# Altium PCB ultrasonic.PcbDoc
Units mil, origin at the board's own origin, x right, y up, seen from the top; angles counter-clockwise.
Board outline 985 x 1369.89 mil, 2 copper layers (Top Layer, Bottom Layer); 36 components, 25 nets, 112 pads, 29 vias.
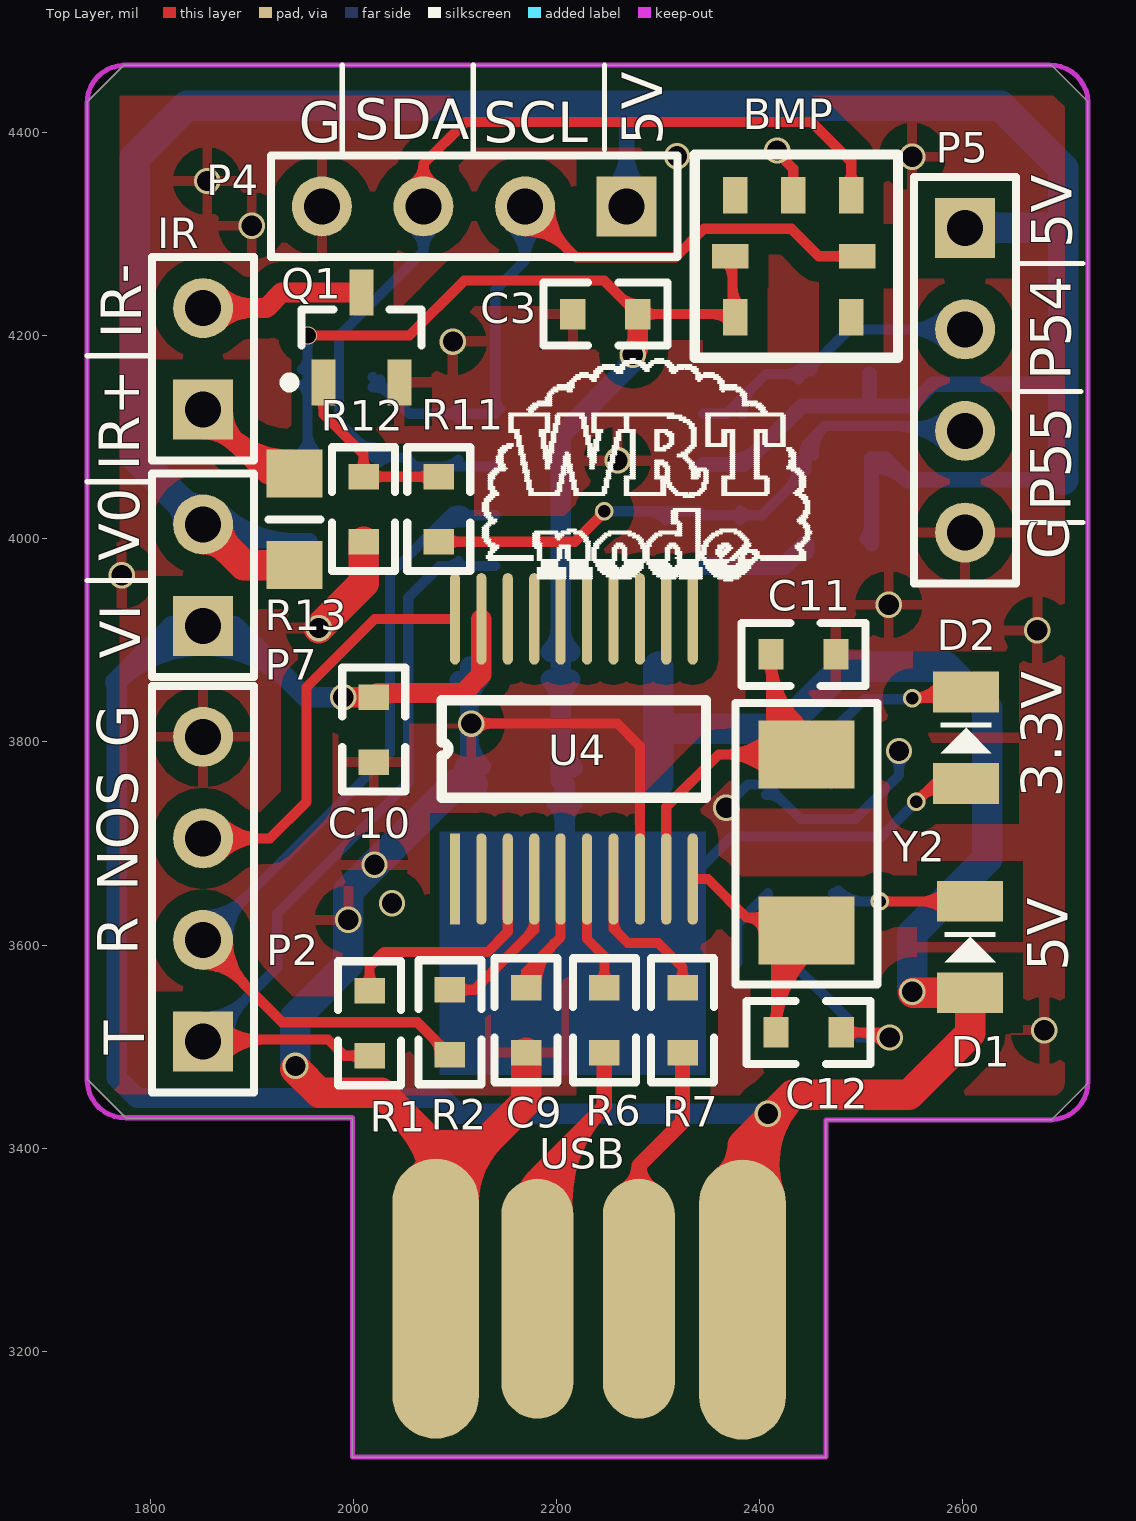
[diagram p0: Top Layer view]
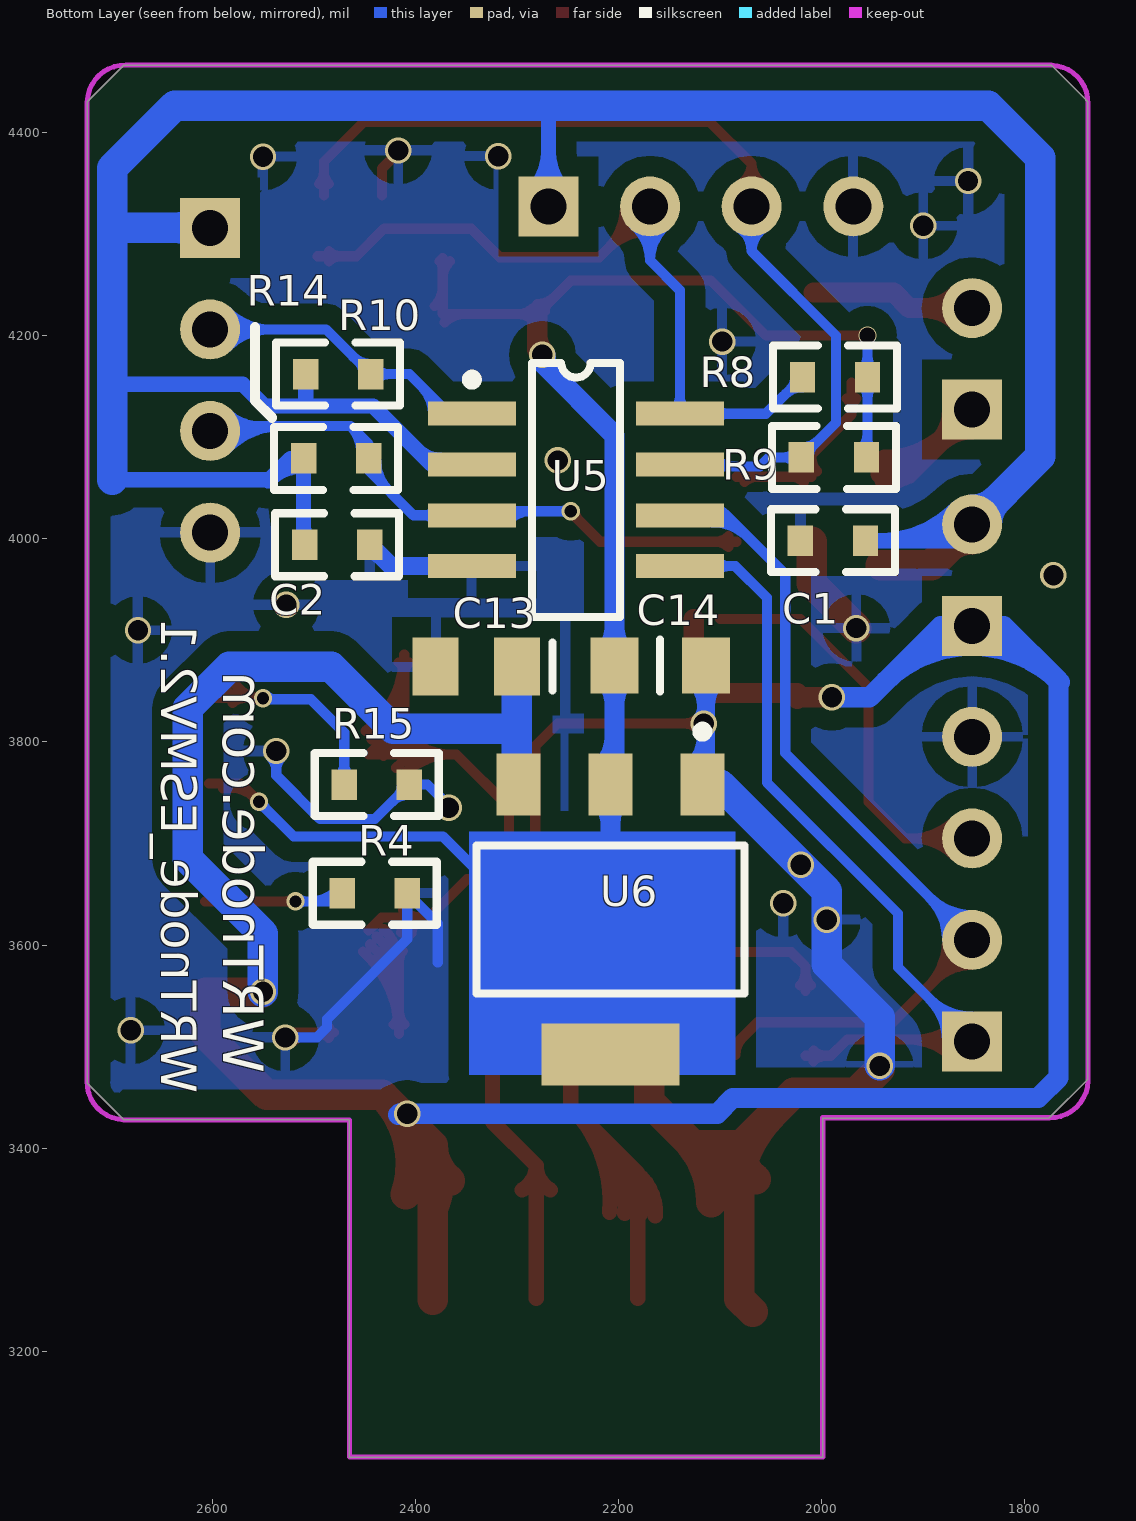
[diagram p1: Bottom Layer view, seen from below]
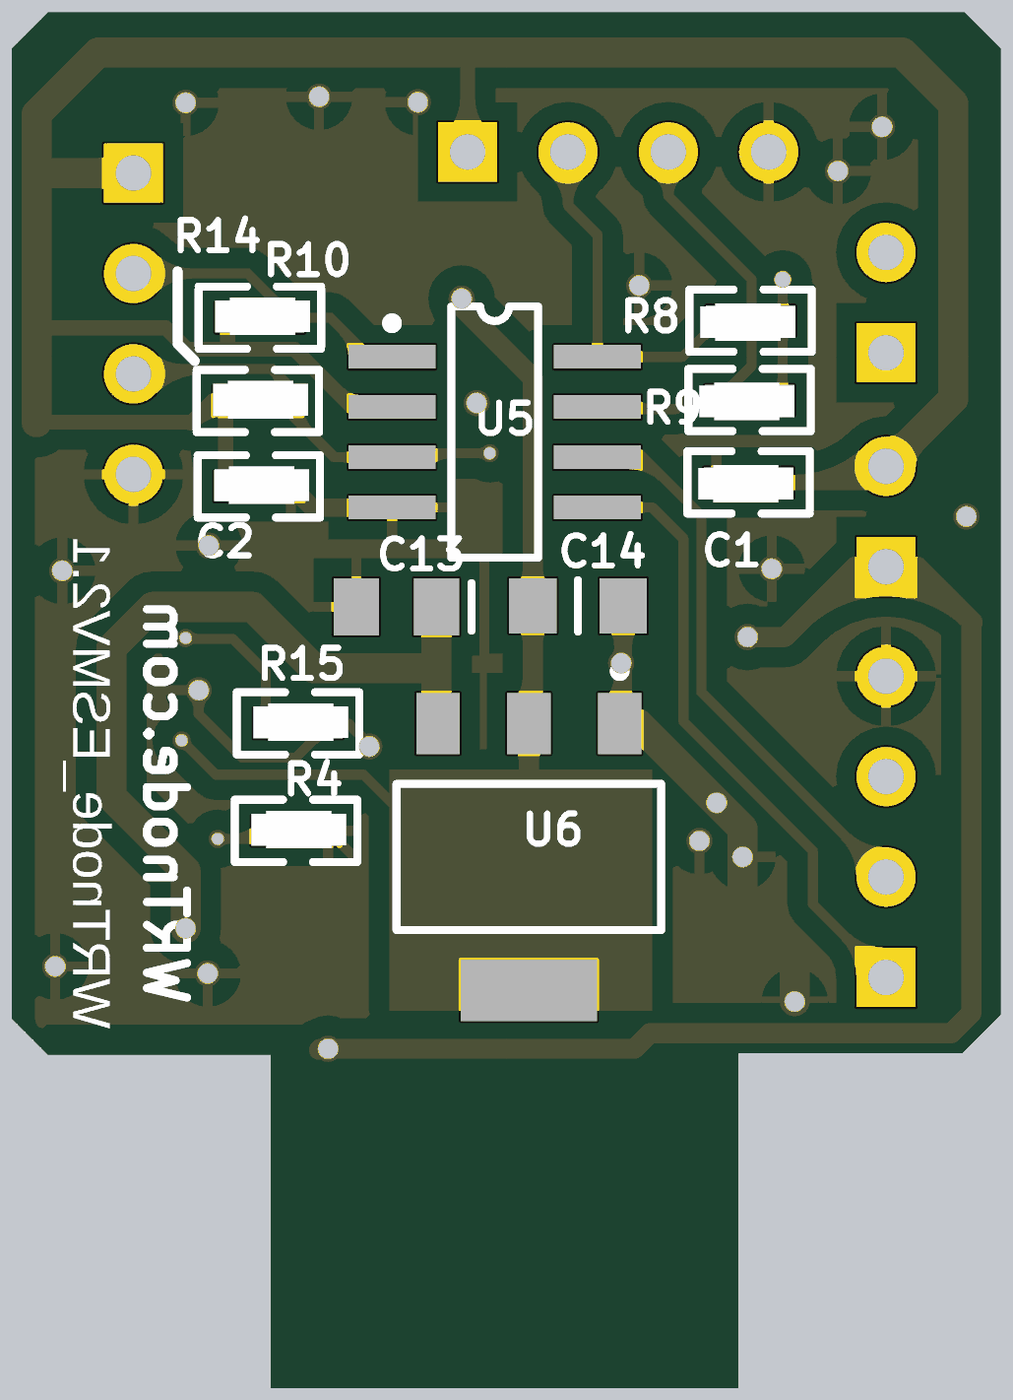
[diagram p2: 3D render of the assembled board from below, using the file's embedded part models]

## Layer stack, top to bottom
Top Layer: signal copper 1.4
Dielectric: dielectric 12.6, FR-4, Dk 4.8
Bottom Layer: signal copper 1.4

## Board outline
1999,3096.11 1999,3429.65 1776.35,3429.65 1776,3430 1738,3468 1738,3499 1738,4430 1774,4466 2205,4466 2687,4466 2723,4430 2723,3464 2687,3428 2465,3428 2465,3096.11 1999,3096.11

## Design rules (kind name [scope] priority, off if disabled: settings)
Clearance [All] p1: gap=7
FabricationTestpoint [(IsPad And (OnTopLayer Or OnBottomLayer))] p1: side=3 testpointundercomponent=TRUE minsize=40 maxsize=100 preferedsize=60 minholesize=0 maxholesize=40 preferedholesize=32 testpointgrid=1 allowsidetop=TRUE allowsidebottom=TRUE usegrid=TRUE gridtolerance=0.01
HoleSize [All] p1: absolutevalues=TRUE maxlimit=160 minlimit=1 maxpercent=80.000 minpercent=20.000
PlaneClearance [All] p1: clearance=10
PlaneConnect [All] p1: planeconnectstyle=Relief reliefexpansion=10 reliefentries=4 reliefconductorwidth=10 reliefairgap=6
PolygonConnect [All] p1: connectstyle=Relief reliefconductorwidth=10 reliefentries=4 polygonreliefangle="90 Angle"
RoutingVias [All] p1: holewidth=10 width=15 viastyle="Through Hole" minholewidth=10 minwidth=15 maxholewidth=25 maxwidth=30
SilkscreenOverComponentPads SilkToSolderMaskClearance [IsPad] p1: minsilkscreentomaskgap=10
SolderMaskExpansion [All] p1: expansion=2
Width [All] p1: maxlimit=50 minlimit=2 preferedwidth=10
23 further rules are at their usual default settings.

## Components (designator, comment, footprint, x,y, rotation, side; value= is the part's Value field where it differs from the comment)
BMP "BMP180" BMP180 2376,4338 r0 top
C1 "Cap" C0603 1994,4002 r180 bottom
C2 "Cap" C0603 2472,3990 r0 bottom
C3 "Cap" C0603 2243,4225 r0 top
C9 "Cap" C0603 2166,3521 r90 top
C10 "Cap" C0603 2016,3807 r90 top
C11 "Cap" C0603 2448,3882 r180 top
C12 "Cap" C0603 2453,3510 r180 top
C13 "Cap" CAP0805(2512) 2340,3874 r0 bottom
C14 "Cap" RES0805(2012M) 2159,3875 r180 bottom
D1 "LED" LED_0805 2607,3598 r270 top
D2 "LED" LED_0805 2603,3804 r270 top
IR "IRLED" HDR1X2 1852,4127 r90 top
P2 "Header 4" HDR1X4 1852,3505 r90 top
P4 "IIC" HDR1X4 2269,4327 r180 top
P5 "DHT11" HDR1X4 2602,4306 r270 top
P7 "Header 2" HDR1X2 1852,3914 r90 top
Q1 "NPN" SOT95P240-3N 2008,4198 r90 top
R1 "Res Semi" C0603 2012,3518 r90 top
R2 "Res Semi" C0603 2091,3519 r90 top
R4 "Res Semi" C0603 2435,3647 r0 bottom
R6 "Res Semi" C0603 2243,3521 r90 top
R7 "Res Semi" C0603 2320,3521 r90 top
R8 "Res1" C0603 1992,4163 r180 bottom
R9 "Res1" C0603 1993,4084 r180 bottom
R10 "Res1" C0603 2471,4158 r0 bottom
R11 "Res1" C0603 2088,4034 r270 top
R12 "Res1" C0603 2014,4034 r270 top
R13 "Res1" RES0805(2012M) 1942,4019 r90 top
R14 "Res1" C0603 2473,4075 r0 bottom
R15 "Res Semi" C0603 2433,3754 r0 bottom
U4 "CH340T" SOP20 2100,3665 r90 top
U5 "STC15W204S" SOP8 2242,4048 r270 bottom
U6 "REG1117-3.3" ZZ311 2208,3625 r0 bottom
USB "USB" USB-JSZ 2321,3252 r180 top
Y2 "XTAL" XTAL-5032 2445,3704 r270 top

## Footprints (in the part's own frame and the unit in brackets; to place one, negate y for a bottom-side part, rotate by r counter-clockwise, add the part's x,y. Pads: shape width x height; smd on the part's side, far side on the other; paste and mask are expansions set on the pad)
BMP180 [mil]
  rect 24x36 smd: 1(0,0) 3(0,-120) 4(114,-120) 6(114,0) 7(57,0)
  rect 36x24 smd: 2(-5,-60) 5(120,-60)
  silkscreen extent -40,-160 160,40
C0603 [mil]
  rect 25x30 smd: 1(-27,-4) 2(37,-4)
  silkscreen extent -56,-35 66,27, body extent -45,-24 49,13, height 30
CAP0805(2512) [mm]
  rect 1.15x1.45 smd: 1(-1.016,0) 2(1.016,0)
  silkscreen extent -1.9,-0.6 -1.9,0.6, body extent -1.07,-0.7 1.07,0.7, height 1.1
HDR1X2 [mm] "Connector; Header; 2 Position"
  rect 1.5x1.5 hole 0.9: 1(0,0)
  round 1.5 hole 0.9: 2(2.54,0)
  silkscreen extent -1.27,-1.27 3.81,1.27
HDR1X4 [mm] "Connector; Header; 4 Position"
  rect 1.5x1.5 hole 0.9: 1(0,0)
  round 1.5 hole 0.9: 2(2.54,0) 3(5.08,0) 4(7.62,0)
  silkscreen extent -1.27,-1.27 8.89,1.27
LED_0805 [mil]
  rect 40x65 smd: 1(45,0) 2(-45,0)
  silkscreen extent -15,-25 15,25, body extent -45,-34 45,34, height 60
RES0805(2012M) [mm]
  rect 1.2x1.4 smd: 1(-1.143,0) 2(1.143,0)
  silkscreen extent 0,-0.65 0,0.65, body extent -1.07,-0.7 1.07,0.7, height 0.65
SOP8 [mm] "Small Outline; 8 Leads; Body Width 4.3 mm; Pitch 1.27 mm"
  rect 0.6x2.2 smd: 1(-1.905,-2.6) 2(-0.635,-2.6) 3(0.635,-2.6) 4(1.905,-2.6) 5(1.905,2.6) 6(0.635,2.6) 7(-0.635,2.6) 8(-1.905,2.6)
  silkscreen extent -3.18,-2.72 3.18,1.1
SOP20 [mil]
  rect 90x10 smd: 1(0,0)
  oval 90x10 smd: 2(0,-26) 3(0,-52) 4(0,-78) 5(0,-104) 6(0,-130) 7(0,-156) 8(0,-182) 9(0,-208) 10(0,-234) 11(256,-234) 12(256,-208) 13(256,-182) 14(256,-156) 15(256,-130) 16(256,-104) 17(256,-78) 18(256,-52) 19(256,-26) 20(256,0)
  silkscreen extent 80,-247 176,13
SOT95P240-3N [mm] "SOT23, 3-Leads, Body 2.9x1.3mm, Pitch 0.95mm, Lead Span 2.4mm, IPC Medium Density"
  rect 1.15x0.6 smd: 1(-1.125,0.95) 2(-1.125,-0.95) 3(1.125,0)
  silkscreen extent -1.25,-1.5 0.7,1.92, body extent -0.7,-1.5 0.7,1.5, height 1.14
USB-JSZ [mm]
  oval 2.17x7 smd: 1(-1.575,0.025) 4(6.096,0)
  oval 1.8x6 smd: 2(1.016,0) 3(3.556,0)
XTAL-5032 [mm]
  rect 1.7x2.4 smd: 1(-2.124,0.025) 2(2.276,0.025)
  silkscreen extent -3.4,-1.75 3.63,1.8, body extent -2.42,-1.45 2.58,1.55, height 1.5
ZZ311 [mm] "SOT-223/SC-73; 4 Leads; Body 6.7 x 7.3 mm, inc. leads (LxW max)"
  rect 1.1x1.55 smd: 1(-2.3,-3.375) 2(0,-3.375) 3(2.3,-3.375)
  rect 3.45x1.55 smd: 4(0,3.375)
  silkscreen extent -3.35,-4.82 3.35,1.85

## Part data
BMP: library part "Header 7", "Header, 7-Pin"
C1 C2 C3 C9 C10 C11 C12 C13 C14: "Capacitor"
D1 D2: library part LED3, "Typical BLUE SiC LED"
IR: library part "Header 2", "Header, 2-Pin"
P2: "Header, 4-Pin"
P4 P5: library part "Header 4", "Header, 4-Pin"
P7: "Header, 2-Pin"
Q1: "NPN Bipolar Transistor"
R1 R2 R4 R6 R7 R15: "Semiconductor Resistor"
R8 R9 R10 R11 R12 R13 R14: "Resistor"
U4: library part CH340
U5: library part stc15f204s_sop8
U6: "800mA and 1A Low Dropout Positive Regulator 2.85V, 3.3V, 5V, and Adjustable"
Y2: "Crystal Oscillator"

## Via types
v1: diameter 26, hole 20, Top Layer to Bottom Layer, tented both sides, 24 vias
v2: diameter 18, hole 12, Top Layer to Bottom Layer, tented both sides, 4 vias
v3: diameter 18, hole 16, Top Layer to Bottom Layer, tented both sides, 1 vias

## Nets (pads, with @x,y where several pads share a name; then routed paths per layer and width w, separated by ;. In a path a pad name is that pad's centre, name@x,y a point inside that pad or via, vN(x,y) a via of type N, cw(c..) or ccw(c..) an arc to the next point about the centre after c; other vN are vias at no path point)
D3.3V: BMP.2 BMP.3 C3.2 C14.1 D2.1 R8.2 R9.2 U6.2 U6.4 | length 2410.4
  Top Layer w10: v3(1955,4200) 2055,4200 2109,4254 2247,4254 C3.2 2373,4221 BMP.2@2373,4276 ; v3@1957.83,4197.17 cw(c1964.66,4190.34) 1964.66,4200 cw(c1964.66,4209.66) v3@1957.83,4202.83 ; 2262.93,4238.07 ccw(c2280,4255.14) C3.2@2280,4231 ; C3.2@2268.96,4232.04 cw(c2260.43,4223.5) C3.2@2272.5,4223.5 ; v1(2275,4181) v1@2280,4186 ; C3.2@2285.3,4215.7 cw(c2298.11,4202.89) 2298.11,4221 cw(c2298.11,4239.11) C3.2@2285.3,4226.3 ; 2351.86,4221 cw(c2351.86,4193.86) BMP.3@2371.05,4213.05 ; BMP.2@2366.05,4273.05 cw(c2349.27,4256.27) 2373,4256.27 ; 2373,4248.14 ccw(c2400.14,4248.14) BMP.3@2380.95,4228.95 ; 2373,4265.93 cw(c2383.07,4265.93) BMP.2@2375.95,4273.05 ; v2(2554,3741) 2572,3759 D2.1 ; v2@2554,3745 ccw(c2554,3754.66) 2560.83,3747.83 ccw(c2567.66,3741) v2@2558,3741 ; v2@2557.75,3744.75 cw(c2582.2,3720.29) D2.1@2589.45,3754.11
  Top Layer w20: v1@2272.88,4183.12 ccw(c2255.69,4200.31) 2280,4200.31 ; v1@2280,4186 C3.2
  Bottom Layer w10: R8.2@1949.7,4151.2 cw(c1936.89,4138.39) 1955,4138.39 cw(c1973.11,4138.39) R8.2@1960.3,4151.2 ; R8.2@1949.7,4166.8 ccw(c1936.89,4179.61) 1955,4179.61 ccw(c1973.11,4179.61) R8.2@1960.3,4166.8 ; R9.2@1950.7,4087.8 ccw(c1940.31,4098.19) 1955,4098.19 ; v3@1952.17,4197.17 cw(c1945.34,4190.34) 1955,4190.34 cw(c1964.66,4190.34) v3@1957.83,4197.17 ; R9.2@1955,4081 R8.2 v3(1955,4200) ; 1955,4103.02 ccw(c1976.52,4103.02) R9.2@1961.3,4087.8 ; 2208,3676 2342,3676 2373,3707 2520,3707 v2(2554,3741) ; v2@2550,3741 cw(c2540.34,3741) 2547.17,3734.17 cw(c2554,3727.34) v2@2554,3737
  Bottom Layer w20: U6.4@2193.5,3506.63 ccw(c2158.48,3541.65) 2208,3541.65 ccw(c2257.52,3541.65) U6.4@2222.5,3506.63 ; C14.1@2194.37,3861.43 cw(c2171.11,3838.18) 2204,3838.18 cw(c2236.89,3838.18) C14.1@2213.63,3861.43 ; C14.1@2194.37,3888.57 ccw(c2171.11,3911.82) 2204,3911.82 ccw(c2236.89,3911.82) C14.1@2213.63,3888.57 ; U6.2@2199.76,3740.78 cw(c2179.87,3720.88) 2208,3720.88 cw(c2236.13,3720.88) U6.2@2216.24,3740.78 ; U6.2@2204,3761.87 C14.1 2204,4102 v1@2275,4173 ; 2204,3804.52 ccw(c2245.79,3804.52) U6.2@2216.24,3774.97 ; U6.4 2208,3676 U6.2 ; 2264.22,4162.22 ccw(c2245.44,4181) v1@2272,4181
D+: R6.2 U4.6 | length 142.5
  Top Layer w10: U4.6 2230,3606 2247,3589 R6.2 ; R6.2@2241.7,3563.3 ccw(c2228.89,3576.11) 2247,3576.11 ccw(c2265.11,3576.11) R6.2@2252.3,3563.3
D-: R7.2 U4.7 | length 198.2
  Top Layer w10: U4.7@2256,3625 ccw(c2277.73,3625) 2262.36,3609.64 ; U4.7 2256,3616 2270,3602 2300,3602 2324,3578 R7.2 ; R7.2@2318.7,3563.3 ccw(c2305.89,3576.11) 2324,3576.11 ccw(c2342.11,3576.11) R7.2@2329.3,3563.3
DATA: P5.2 R10.1 U5.1 | length 526.7
  Bottom Layer w10: U5.1 2367,4123 2406,4162 R10.1 2488,4206 P5.2 ; U5.1@2382.67,4123 cw(c2420.5,4123) 2393.75,4149.75 ; R10.1@2438.7,4156.7 ccw(c2425.89,4143.89) 2425.89,4162 ccw(c2425.89,4180.11) R10.1@2438.7,4167.3 ; R10.1@2444,4172 ccw(c2444,4196.14) 2461.07,4179.07 ; R10.1@2451.5,4164.5 cw(c2463.57,4164.5) R10.1@2455.04,4173.04 ; P5.2@2584.66,4188.66 ccw(c2542.79,4146.79) 2542.79,4206 ccw(c2542.79,4265.21) P5.2@2584.66,4223.34 ; P5.2@2591.73,4195.73 ccw(c2566.93,4170.93) 2566.93,4206 ccw(c2566.93,4241.07) P5.2@2591.73,4216.27
GND: BMP.7 C1.1 C2.1 C3.1 C9.1 C10.1 C11.1 C12.1 C13.2 C14.2 P2.4 P4.4 P5.4 Q1.2 R4.1 R12.2 R15.1 U4.8 U5.4 U6.1 USB.4 | length 2734.3
  Top Layer w10: v1@2110,3818 v1(2116,3818) 2260,3818 2282,3796 U4.8 ; v1@2121.66,3812.34 cw(c2135.31,3798.69) 2135.31,3818 cw(c2135.31,3837.31) v1@2121.66,3823.66 ; v1@2417,4380 2433,4364 BMP.7 ; C12.1 2523,3514 v1(2528,3509) ; C12.1@2485.3,3508.7 cw(c2498.11,3495.89) 2498.11,3514 cw(c2498.11,3532.11) C12.1@2485.3,3519.3 ; 2496.62,3514 cw(c2496.62,3477.62) v1@2522.34,3503.34
  Top Layer w30: v1@1943,3478 1966.5,3454.5 2027.5,3454.5 2081,3401 ; v1(1966,3912) 2010,3956 R12.2 ; 2049.49,3432.51 cw(c1967.75,3350.77) USB.4@2083.28,3347 ; USB.4@2064.87,3369.62 ccw(c2042.41,3401) 2081,3401 ; USB.4@2068,3239 USB.4 USB.4@2081,3357 ; USB.4@2081,3374.8 ccw(c2081,3417.76) 2111.38,3387.38 ; 2083.5,3403 2121,3403 ; USB.4@2097.13,3369.62 cw(c2119.59,3401) 2081,3401 ; USB.4@2108.72,3347.08 cw(c2199.58,3347.08) 2135.33,3411.33 ; C9.1 2170,3446 USB.4@2081,3357 ; USB.4@2081,3357 2081,3401
  Bottom Layer w10: v1@2367,3737 2388,3758 R15.1 2440,3724 2494.01,3724 2537,3766.99 v1(2537,3791) ; 2378,3583 2378,3621 R4.1 2408,3606 2487,3527 2487,3519 2497,3509 v1(2528,3509) ; R15.1@2406,3748 cw(c2406,3723.86) 2423.07,3740.93 ; R15.1@2413.5,3755.5 ccw(c2425.57,3755.5) R15.1@2417.04,3746.96 ; v1@2531.34,3785.34 cw(c2517.69,3771.69) 2537,3771.69 cw(c2556.31,3771.69) v1@2542.66,3785.34
  Bottom Layer w18: C14.2@2103.66,3860.72 cw(c2078.7,3835.76) 2114,3835.76 cw(c2149.3,3835.76) C14.2@2124.34,3860.72 ; U6.1@2108.5,3775.68 ccw(c2095.23,3788.95) 2114,3788.95 ; 2114,3803.51 cw(c2130.49,3803.51) v1@2118.83,3815.17 ; v1@2114,3805.61 ccw(c2156.32,3805.61) U6.1@2126.4,3775.68 ; 2114,3832.49 ccw(c2130.49,3832.49) v1@2118.83,3820.83 ; C14.2 2114,3761.32 U6.1 ; U5.4 2424,3973 C2.1 ; C2.1@2434.76,3983.76 cw(c2445,3973.51) C2.1@2445,3988
  Bottom Layer w30: v1@1943,3481.5 1943,3529 1995,3581 1995,3653.11 2099.76,3757.87 U6.1
  other v1: 1943,3481 2680,3516 1995,3625 2038,3641 2020.81,3678.92 2367,3735 2673,3910 2527,3935 1772,3964 2260,4077 2098,4194 1900,4308 1856,4352 2550,4376 2318.53,4376.53 2417,4382
IR: P5.3 R11.2 R14.1 U5.3 | length 899
  Top Layer w10: R11.2 2218,3997 v2@2245,4024 ; R11.2@2091.8,3991.7 cw(c2104.61,3978.89) 2104.61,3997 cw(c2104.61,4015.11) R11.2@2091.8,4002.3 ; 2239.46,4018.46 ccw(c2230.93,4027) v2@2243,4027
  Bottom Layer w10: v2(2247,4027) 2340.36,4027 U5.3 2402,4023 2446,4067 R14.1 2446,4093 2464,4111 ; v2@2249.83,4024.17 cw(c2256.66,4017.34) 2256.66,4027 cw(c2256.66,4036.66) v2@2249.83,4029.83 ; 2286.77,4027 cw(c2286.77,3996.9) U5.3@2308.05,4018.18 ; U5.3@2380.67,4018.18 cw(c2392.3,4006.56) 2392.3,4023 cw(c2392.3,4039.44) U5.3@2380.67,4027.82 ; 2426.48,4047.48 ccw(c2397.46,4076.5) R14.1@2438.5,4076.5 ; R14.1@2443.51,4081.29 cw(c2461.76,4082.86) 2448.81,4095.81 ; R14.1@2453.47,4082.14 cw(c2489.74,4085.26) 2464,4111 ; 2530.71,4111 cw(c2530.71,4034.71) P5.3@2584.66,4088.66 ; P5.3@2584.66,4123.34 cw(c2554.86,4153.14) 2554.86,4111 cw(c2554.86,4058.86) P5.3@2591.73,4095.73 ; P5.3 2597,4111 2464,4111
NetC9_2: C9.2 U4.5 | length 224.1
  Top Layer w10: C9.2@2165.2,3563.76 ccw(c2156.69,3574) 2170,3574 ; C9.2@2174.8,3563.76 cw(c2183.31,3574) 2170,3574 ; C9.2@2180,3558 cw(c2242.77,3558) 2198.38,3602.38 ; 2181.31,3585.31 ccw(c2208.63,3558) C9.2 2170,3574 ; U4.5 2204,3608 2170,3574
NetC11_2: C11.2 U4.9 Y2.1 | length 844
  Top Layer w10: U4.9 2308,3736 2359.61,3787.61 Y2.1 2411,3822.61 C11.2 ccw(c2504.78,3885.99) Y2.1@2449.12,3810.52 ; C11.2@2405.7,3878.2 cw(c2392.89,3865.39) 2411,3865.39 cw(c2429.11,3865.39) C11.2@2416.3,3878.2 ; 2411,3826.59 ccw(c2460.97,3826.59) Y2.1@2431.31,3786.38 ; 2411,3846.39 ccw(c2475.57,3846.39) Y2.1@2437.24,3794.43 ; 2411,3866.19 ccw(c2490.18,3866.19) Y2.1@2443.18,3802.47 ; Y2.1@2412.09,3767.49 ccw(c2363.5,3718.89) 2363.5,3787.61 ccw(c2363.5,3856.33) Y2.1@2412.09,3807.74 ; Y2.1@2413.27,3820.34 cw(c2399.62,3806.69) Y2.1@2416.28,3796.94 ; Y2.1@2419.16,3774.56 ccw(c2387.64,3743.04) 2387.64,3787.61 ccw(c2387.64,3832.19) Y2.1@2419.16,3800.67
NetC12_2: C12.2 U4.10 Y2.2 | length 570
  Top Layer w10: U4.10 2349,3665 2387,3627 ; 2393.95,3627 ccw(c2393.95,3652.65) Y2.2@2412.09,3634.51 ; 2398.01,3627 cw(c2398.01,3611.1) Y2.2@2413.84,3612.62 ; Y2.2@2403.89,3611.66 ccw(c2387,3610.04) 2387,3627 ; C12.2@2410.7,3521.8 ccw(c2397.89,3534.61) 2416,3534.61 ccw(c2434.11,3534.61) C12.2@2421.3,3521.8 ; Y2.2@2412.09,3594.26 cw(c2402.66,3584.83) Y2.2@2416,3584.83 ; C12.2@2416,3512.7 cw(c2525.57,3512.7) Y2.2@2451.47,3593.42 ; C12.2 Y2.2@2416,3584.39 ; 2416,3535.46 cw(c2504.68,3535.46) Y2.2@2444.71,3600.78 ; 2416,3558.21 cw(c2483.79,3558.21) Y2.2@2437.94,3608.15 ; Y2.2@2416,3580.97 cw(c2462.9,3580.97) Y2.2@2431.18,3615.52 ; Y2.2 2433.39,3627 2387,3627
NetD1_2: D1.2 R4.2 | length 254.5
  Top Layer w10: v2(2518,3643) D1.2 ; v2@2520.83,3640.17 cw(c2527.66,3633.34) 2527.66,3643 cw(c2527.66,3652.66) v2@2520.83,3645.83 ; D1.2@2583.89,3632.39 ccw(c2558.29,3606.79) 2558.29,3643 ccw(c2558.29,3679.21) D1.2@2583.89,3653.61
  Bottom Layer w10: R4.2 2480,3643 v2(2518,3643) ; R4.2@2477.3,3653.8 ccw(c2503.38,3679.88) 2503.38,3643 ; v2@2515.17,3640.17 ccw(c2508.34,3633.34) 2508.34,3643 ccw(c2508.34,3652.66) v2@2515.17,3645.83
NetD2_2: D2.2 R15.2 | length 319.5
  Top Layer w10: v2@2552.83,3840.17 cw(c2559.66,3833.34) 2559.66,3843 cw(c2559.66,3852.66) v2@2552.83,3845.83 ; 2568.77,3843 cw(c2568.77,3827.27) D2.2@2579.89,3838.39 ; 2569.29,3843 ccw(c2569.29,3863.95) D2.2@2586.41,3851.88 ; D2.2@2578.24,3857.64 cw(c2550,3877.55) v2(2550,3843) 2597,3843 D2.2
  Bottom Layer w10: R15.2@2464.7,3765.8 ccw(c2451.89,3778.61) 2470,3778.61 ccw(c2488.11,3778.61) R15.2@2475.3,3765.8 ; R15.2 2470,3809 2503,3842 v2@2550,3842 ; 2537.93,3842 ccw(c2537.93,3855.07) v2@2547.17,3845.83
NetIR_1: IR.1 R13.2 | length 291.3
  Top Layer w20: IR.1@1852,4107.47 cw(c1852,4060.33) 1885.34,4093.66 cw(c1918.67,4127) IR.1@1871.53,4127 ; IR.1 1915,4064 R13.2 ; IR.1@1875.44,4103.56 ccw(c1938.06,4166.19) R13.2@1938.06,4077.62 ; 1909.58,4069.42 ccw(c1938.06,4097.9) R13.2@1938.06,4057.62
NetIR_2: IR.2 Q1.3 | length 236.4
  Top Layer w20: IR.2 1914,4227 1929.29,4242.29 Q1.3 ; IR.2@1865.81,4213.19 cw(c1899.14,4179.86) 1899.14,4227 cw(c1899.14,4274.14) IR.2@1865.81,4240.81
NetP2_3: P2.3 U4.20 | length 551.8
  Top Layer w10: P2.3 1918,3705 1954,3741 1954,3854 2021,3921 U4.20 ; P2.3@1862.27,3694.73 cw(c1887.07,3669.93) 1887.07,3705 cw(c1887.07,3740.07) P2.3@1862.27,3715.27 ; P2.3@1869.34,3687.66 cw(c1911.21,3645.79) 1911.21,3705 cw(c1911.21,3764.21) P2.3@1869.34,3722.34
NetQ1_2: Q1.1 R11.1 R12.1 | length 294.2
  Top Layer w10: Q1.1@1965.78,4138.07 cw(c1954.16,4126.44) 1970.6,4126.44 cw(c1987.04,4126.44) Q1.1@1975.41,4138.07 ; Q1.1 1970.6,4122.4 2010,4083 R12.1 R11.1 ; R12.1@2004.7,4066.3 ccw(c1991.89,4079.11) 2010,4079.11 ccw(c2028.11,4079.11) R12.1@2015.3,4066.3 ; R12.1@2017.8,4055.7 cw(c2030.61,4042.89) 2030.61,4061 cw(c2030.61,4079.11) R12.1@2017.8,4066.3 ; R11.1@2076.2,4055.7 ccw(c2063.39,4042.89) 2063.39,4061 ccw(c2063.39,4079.11) R11.1@2076.2,4066.3
NetR1_2: R1.2 U4.3 | length 297.5
  Top Layer w10: R1.2@2010.7,3560.3 ccw(c1997.89,3573.11) 2016,3573.11 ccw(c2034.11,3573.11) R1.2@2021.3,3560.3 ; R1.2 2016,3579 2030,3593 2131.96,3593 2152,3613.04 U4.3 U4.3@2152,3622
NetR2_2: R2.2 U4.4 | length 204.8
  Top Layer w10: R2.2 2119,3556 2178,3615 U4.4 ; R2.2@2102.8,3550.7 cw(c2115.61,3537.89) 2115.61,3556 cw(c2115.61,3574.11) R2.2@2102.8,3561.3 ; 2170.93,3607.93 ccw(c2153.86,3625) U4.4@2178,3625
NetR6_1: R6.1 USB.3 | length 620.5
  Top Layer w15: USB.3@2163.99,3333.27 cw(c2213.28,3337.34) 2178.31,3372.31 ; USB.3@2171.18,3360.83 ccw(c2165.86,3375) 2181,3375 ; USB.3@2178.94,3334.51 cw(c2255.58,3340.83) 2201.2,3395.2 ; USB.3 2181,3375 ; USB.3@2190.82,3360.83 cw(c2196.14,3375) 2181,3375 ; USB.3@2193.89,3335.74 cw(c2297.89,3344.31) 2224.1,3418.1 ; USB.3@2208.84,3336.97 cw(c2340.19,3347.8) 2247,3441 ; R6.1 2247,3441 ; 2181,3375 2247,3441
NetR7_1: R7.1 USB.2 | length 318.2
  Top Layer w15: USB.2@2267.06,3358.88 ccw(c2253.17,3383) 2281,3383 ; USB.2 2281,3383 ; USB.2@2294.94,3358.88 cw(c2308.83,3383) 2281,3383 ; R7.1 2324,3426 2281,3383
RXD: P2.2 R2.1 U5.6 | length 1292.7
  Top Layer w10: P2.2@1852,3580.47 cw(c1852,3528.5) 1888.75,3565.25 ; P2.2@1852,3590.47 cw(c1852,3562.64) 1871.68,3582.32 ; P2.2@1852,3602 1930,3524 2063,3524 R2.1 ; P2.2@1866.53,3605 ccw(c1908.84,3605) 1878.92,3575.08 ; P2.2@1876.53,3605 ccw(c1942.98,3605) 1895.99,3558.01 ; 2077.93,3509.07 cw(c2060.86,3492) R2.1@2085,3492 ; R2.1@2083.96,3503.04 ccw(c2092.5,3511.57) R2.1@2092.5,3499.5
  Bottom Layer w10: P2.2 2036,3789 2036,3965 2094,4023 ; P2.2@1852,3619.53 ccw(c1852,3654.6) 1876.8,3629.8 ccw(c1901.6,3605) P2.2@1866.53,3605 ; P2.2@1852,3629.53 ccw(c1852,3688.74) 1893.87,3646.87 ccw(c1935.74,3605) P2.2@1876.53,3605 ; 2072.37,4001.37 cw(c2108.14,3965.6) U5.6@2108.14,4016.19 ; 2086.93,4015.93 cw(c2096.47,4006.39) U5.6@2104.23,4017.43 ; 2089.44,4018.44 cw(c2108.14,3999.75) U5.6@2108.14,4026.19 ; 2095.34,4024.34 cw(c2103.41,4016.27) U5.6@2109.98,4025.61 ; U5.6@2102.82,4018.75 ccw(c2094,4011.72) 2094,4023 ; U5.6@2102.82,4027.25 cw(c2094,4034.28) 2094,4023 ; U5.6 2094,4023
SCL: BMP.5 P4.2 R8.1 U5.8 | length 1101.2
  Top Layer w10: P4.2@2169,4302.47 cw(c2169,4243.26) 2210.87,4285.13 cw(c2252.74,4327) P4.2@2193.53,4327 ; P4.2@2169,4312.47 cw(c2169,4277.4) 2193.8,4302.2 cw(c2218.6,4327) P4.2@2183.53,4327 ; P4.2 2219,4277 2317,4277 2345,4305 2431,4305 2458,4278 BMP.5 ; BMP.5@2485.05,4273.05 ccw(c2473.1,4261.1) 2473.1,4278 ccw(c2473.1,4294.9) BMP.5@2485.05,4282.95
  Bottom Layer w10: R8.1@2019,4149 cw(c2019,4124.86) 2036.07,4141.93 ; R8.1 2055,4123 U5.8 2139.64,4244.64 2169,4274 ; R8.1@2026.5,4156.5 ccw(c2038.57,4156.5) R8.1@2030.04,4147.96 ; U5.8@2103.33,4118.18 ccw(c2091.7,4106.56) 2091.7,4123 ccw(c2091.7,4139.44) U5.8@2103.33,4127.82 ; U5.8@2134.82,4127.82 ccw(c2123.19,4139.44) 2139.64,4139.44 ccw(c2156.08,4139.44) U5.8@2144.45,4127.82 ; P4.2@2153.13,4308.3 cw(c2124.01,4274) 2169,4274 ; P4.2@2159.6,4315.93 cw(c2142.35,4295.61) 2169,4295.61 cw(c2195.65,4295.61) P4.2@2178.4,4315.93 ; P4.2 2169,4274 ; P4.2@2184.87,4308.3 ccw(c2213.99,4274) 2169,4274
SDA: BMP.6 P4.3 R9.1 U5.7 | length 1155.9
  Top Layer w10: P4.3@2056.95,4348.36 ccw(c2045.31,4369) 2069,4369 ; P4.3 2069,4369 ; P4.3@2081.05,4348.36 cw(c2092.69,4369) 2069,4369 ; BMP.6@2485.05,4348.95 ccw(c2473.1,4360.9) 2490,4360.9 ccw(c2506.9,4360.9) BMP.6@2494.95,4348.95 ; BMP.6 2490,4371 2451,4410 2110,4410 2069,4369
  Bottom Layer w10: 2002.93,4097.07 ccw(c2020,4114.14) R9.1@2020,4090 ; R9.1@2008.96,4091.04 cw(c2000.43,4082.5) R9.1@2012.5,4082.5 ; R9.1@2025.3,4074.7 cw(c2038.11,4061.89) 2038.11,4080 cw(c2038.11,4098.11) R9.1@2025.3,4085.3 ; P4.3@2056.1,4306.14 cw(c2041.8,4283) 2069,4283 ; P4.3 2069,4283 ; P4.3@2081.9,4306.14 ccw(c2096.2,4283) 2069,4283 ; 2086.87,4071 ccw(c2086.87,4094.27) U5.7@2103.33,4077.82 ; U5.7 2137.64,4071 2061,4071 2052,4080 R9.1 1986,4114 1986,4200 2069,4283
TXD: P2.1 R1.1 U5.5 | length 1142.3
  Top Layer w10: P2.1@1852,3502 1857,3507 1975,3507 1991,3491 R1.1 ; P2.1@1862.27,3494.73 cw(c1891.9,3465.1) 1891.9,3507 ; P2.1@1862.27,3515.27 ccw(c1882.24,3535.24) 1882.24,3507 ; P2.1@1869.34,3487.66 cw(c1916.04,3440.96) 1916.04,3507 ; P2.1@1869.34,3522.34 ccw(c1906.39,3559.39) 1906.39,3507 ; R1.1@2008.2,3485.7 ccw(c1995.39,3472.89) 1995.39,3491 ccw(c1995.39,3509.11) R1.1@2008.2,3496.3
  Bottom Layer w10: P2.1 1925,3578 1925,3631 2054,3760 2054,3942 2085,3973 U5.5 ; P2.1@1852,3519.53 ccw(c1852,3554.6) 1876.8,3529.8 ccw(c1901.6,3505) P2.1@1866.53,3505 ; P2.1@1852,3529.53 ccw(c1852,3588.74) 1893.87,3546.87 ccw(c1935.74,3505) P2.1@1876.53,3505 ; U5.5@2103.33,3968.18 ccw(c2091.7,3956.56) 2091.7,3973 ccw(c2091.7,3989.44) U5.5@2103.33,3977.82
VCC: C10.2 C13.1 D1.1 P7.1 U4.19 U6.3 USB.1 | length 3426.3
  Top Layer w20: v1(1990,3844) C10.2 2024,3848 2108,3848 2126,3866 U4.19 ; C10.2@2024.27,3842.23 cw(c2038.19,3828.31) 2038.19,3848
  Top Layer w30: USB.1@2365.91,3367.9 ccw(c2338.42,3403) 2383,3403 ; USB.1@2380.83,3345.36 cw(c2448.44,3367.73) 2398.09,3418.09 ; USB.1 2383,3403 ; USB.1@2400.09,3367.9 cw(c2427.58,3403) 2383,3403 ; USB.1@2409.31,3354.78 cw(c2500.16,3384.84) 2432.5,3452.5 ; v1@2551,3553 D1.1 2607,3513 2546.5,3452.5 2432.5,3452.5 ; 2383,3403 2432.5,3452.5
  Bottom Layer w20: 1765.74,3858.74 cw(c1852,3772.49) 1852,3894.47 cw(c1852,3772.49) 1938.26,3858.74 ; 1799.89,3892.89 cw(c1852,3840.77) 1852,3914.47 cw(c1852,3840.77) 1904.11,3892.89 ; v1(1990,3844) 1953,3844 1883,3914 P7.1 1821,3914 1767,3860 1767,3469.5 1787,3449.5 2087.5,3449.5 2103,3434 v1(2408,3434) 2416,3434 v1@2417,3433
  Bottom Layer w30: U6.3@2300,3759.32 2300,3813 ; C13.1 2300,3813 ; v1(2550,3554) 2550,3611 2624,3685 2624,3833 2583,3874 2483,3874 2422,3813 2300,3813
VCC5: C1.2 C2.2 P4.1 P5.1 P7.2 R10.2 R13.1 R14.2 U5.2 | length 3229.8
  Top Layer w30: P7.2@1852,3999.47 cw(c1852,3964.4) 1876.8,3989.2 cw(c1901.6,4014) P7.2@1866.53,4014 ; P7.2 1892,3974 R13.1
  Bottom Layer w15: P7.2 1868,3998 C1.2 ; P7.2@1856.97,4018.97 ccw(c1907.59,4069.59) 1907.59,3998 ; P7.2@1867.58,4029.58 ccw(c1943.81,4105.81) 1943.81,3998 ; P4.1@2253.42,4342.58 ccw(c2215.82,4380.18) 2269,4380.18 ccw(c2322.18,4380.18) P4.1@2284.58,4342.58 ; P4.1 2269,4426 ; U5.2 2384,4073 2441.5,4130.5 2508,4130.5 ; U5.2@2375.86,4077.31 ccw(c2375.86,4107.38) 2397.12,4086.12 ; C2.2@2505.46,4000.04 ccw(c2494.51,4010.99) 2510,4010.99 ; R10.2 2508,4130.5 ; C2.2@2510,3995 R14.2 2523,4079 2544,4058 2697.5,4058 ; R14.2@2510,4071.5 cw(c2510,4022.01) 2545,4057 ; 2698.5,4154 2696.5,4152 2570,4152 2548.5,4130.5 2508,4130.5
  Bottom Layer w30: P7.2@1837.47,4014 ccw(c1802.4,4014) 1827.2,4038.8 ccw(c1852,4063.6) P7.2@1852,4028.53 ; P7.2 1785,4081 1785,4375 1836,4426 2269,4426 2637,4426 2698.5,4364.5 2698.5,4154 2698.5,4058 ; P5.1 2695.5,4306 ; P5.1@2612.27,4295.73 cw(c2637.07,4270.93) 2637.07,4306 cw(c2637.07,4341.07) P5.1@2612.27,4316.27
pads on no net: BMP.1 BMP.4 U4.1 U4.2 U4.11 U4.12 U4.13 U4.14 U4.15 U4.16 U4.17 U4.18

## Polygon pours and split planes (outlines as drawn)
GND on Bottom Layer "Bottom Layer-No Net" (solid): 1753,4449 1753,3458 2688,3458 2700,3446 2707,3453 2707,4449 1766,4449 1763,4446
GND on Top Layer "Bottom Layer-No Net" (solid): 1762,3455 1765,3452 2707,3452 2707,4418 2689,4436 1770,4436 1770,3463 1762,3455

## Keep-outs
Keep-Out Layer:
  lines w5: 1776,3430 cw(c1775,3467) 1738,3466 1738,4428 cw(c1775,4429) 1774,4466 2685,4466 cw(c2686,4429) 2723,4430 2723,3466 cw(c2686,3465) 2687,3428 2465,3428 2465,3096.11 1999,3096.11 1999,3430 1777,3430

## Other copper
Bottom Layer:
  rectangle net D3.3V: 2085,3472 2347,3712

## Silkscreen, mask and mechanical layers (free items; w line width, h text height)
Top Overlay:
  drawing of 862 lines, arcs and shapes, not listed
  text "SDA" at 2001,4393 h40
  text "G" at 1946,4390 h40
  text "SCL" at 2128,4390 h40
  text "5V" at 2304,4387 h40 r90
  text "5V" at 2707,4286 h40 r90
  text "IR-" at 1791,4197 h40 r90
  text "P54" at 2706,4156 h40 r90
  text "IR+" at 1789,4067 h40 r90
  text "P55" at 2706,4027 h40 r90
  text "G" at 2704,3979 h40 r90
  text "V0" at 1789,3978 h40 r90
  text "VI" at 1790,3882 h40 r90
  text "G" at 1788,3794 h40 r90
  text "3.3V" at 2697,3745 h40 r90
  text "NOS" at 1788,3653 h40 r90
  text "R" at 1788,3590 h40 r90
  text "5V" at 2703,3574 h40 r90
  text "T" at 1794,3492 h40 r90
Bottom Overlay:
  lines w10: 2541,4119 2558,4136 2558,4208
  text "WRTnode.com" at 2589,3474 h40 r90
  text "WRTnode_ESMV2.1" at 2662,3454 h60 r90